# Altium PCB Fusebox_PCB.PcbDoc
Units mm, origin at the board's own origin, x right, y up, seen from the top; angles counter-clockwise.
Board outline 110 x 90 mm, 4 copper layers (Top Layer, Inner Layer1, Inner Layer2, Bottom Layer), stack 1.369 mm thick; 100 components, 77 nets, 364 pads, 0 vias.
Unrouted connection lines stored in the file: 258.
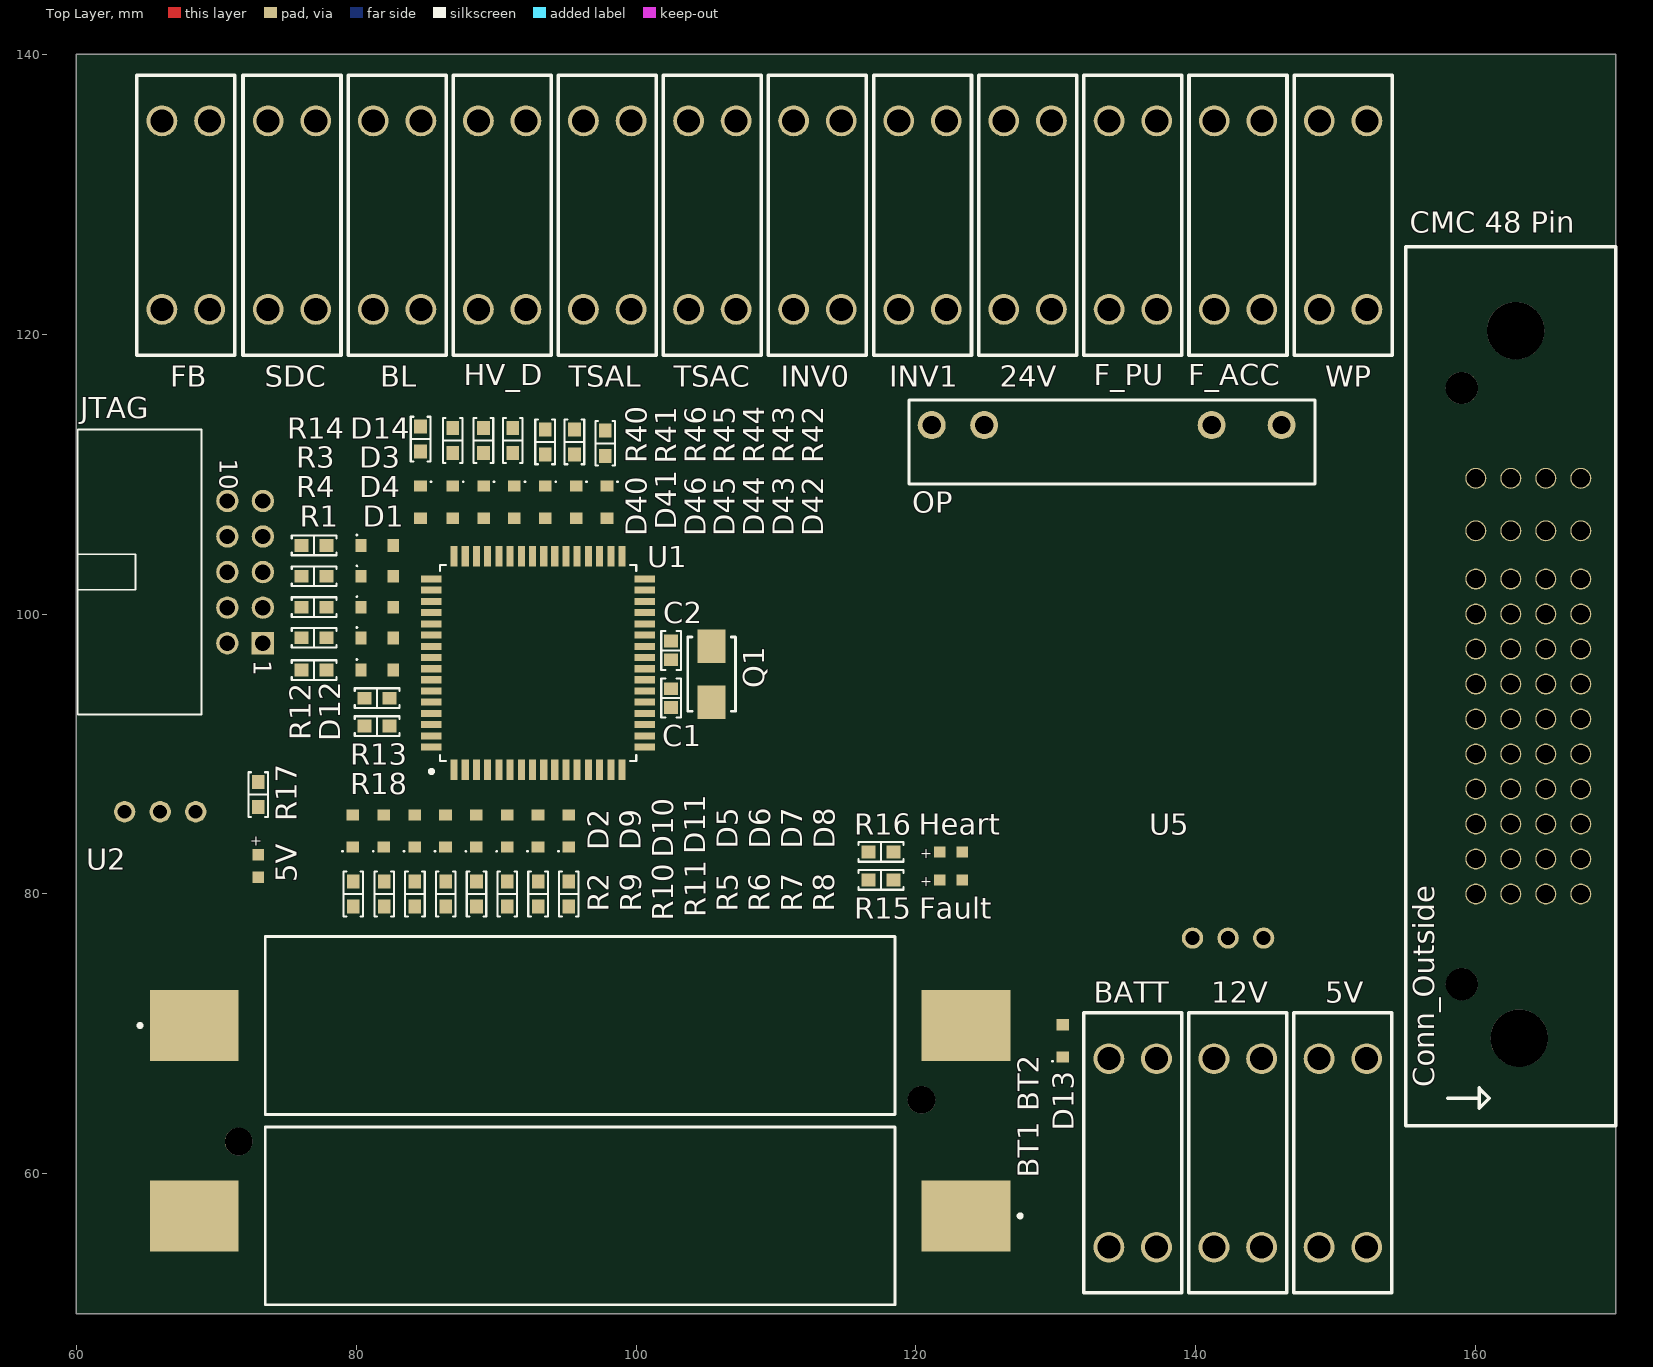
[diagram p0: Top Layer view]
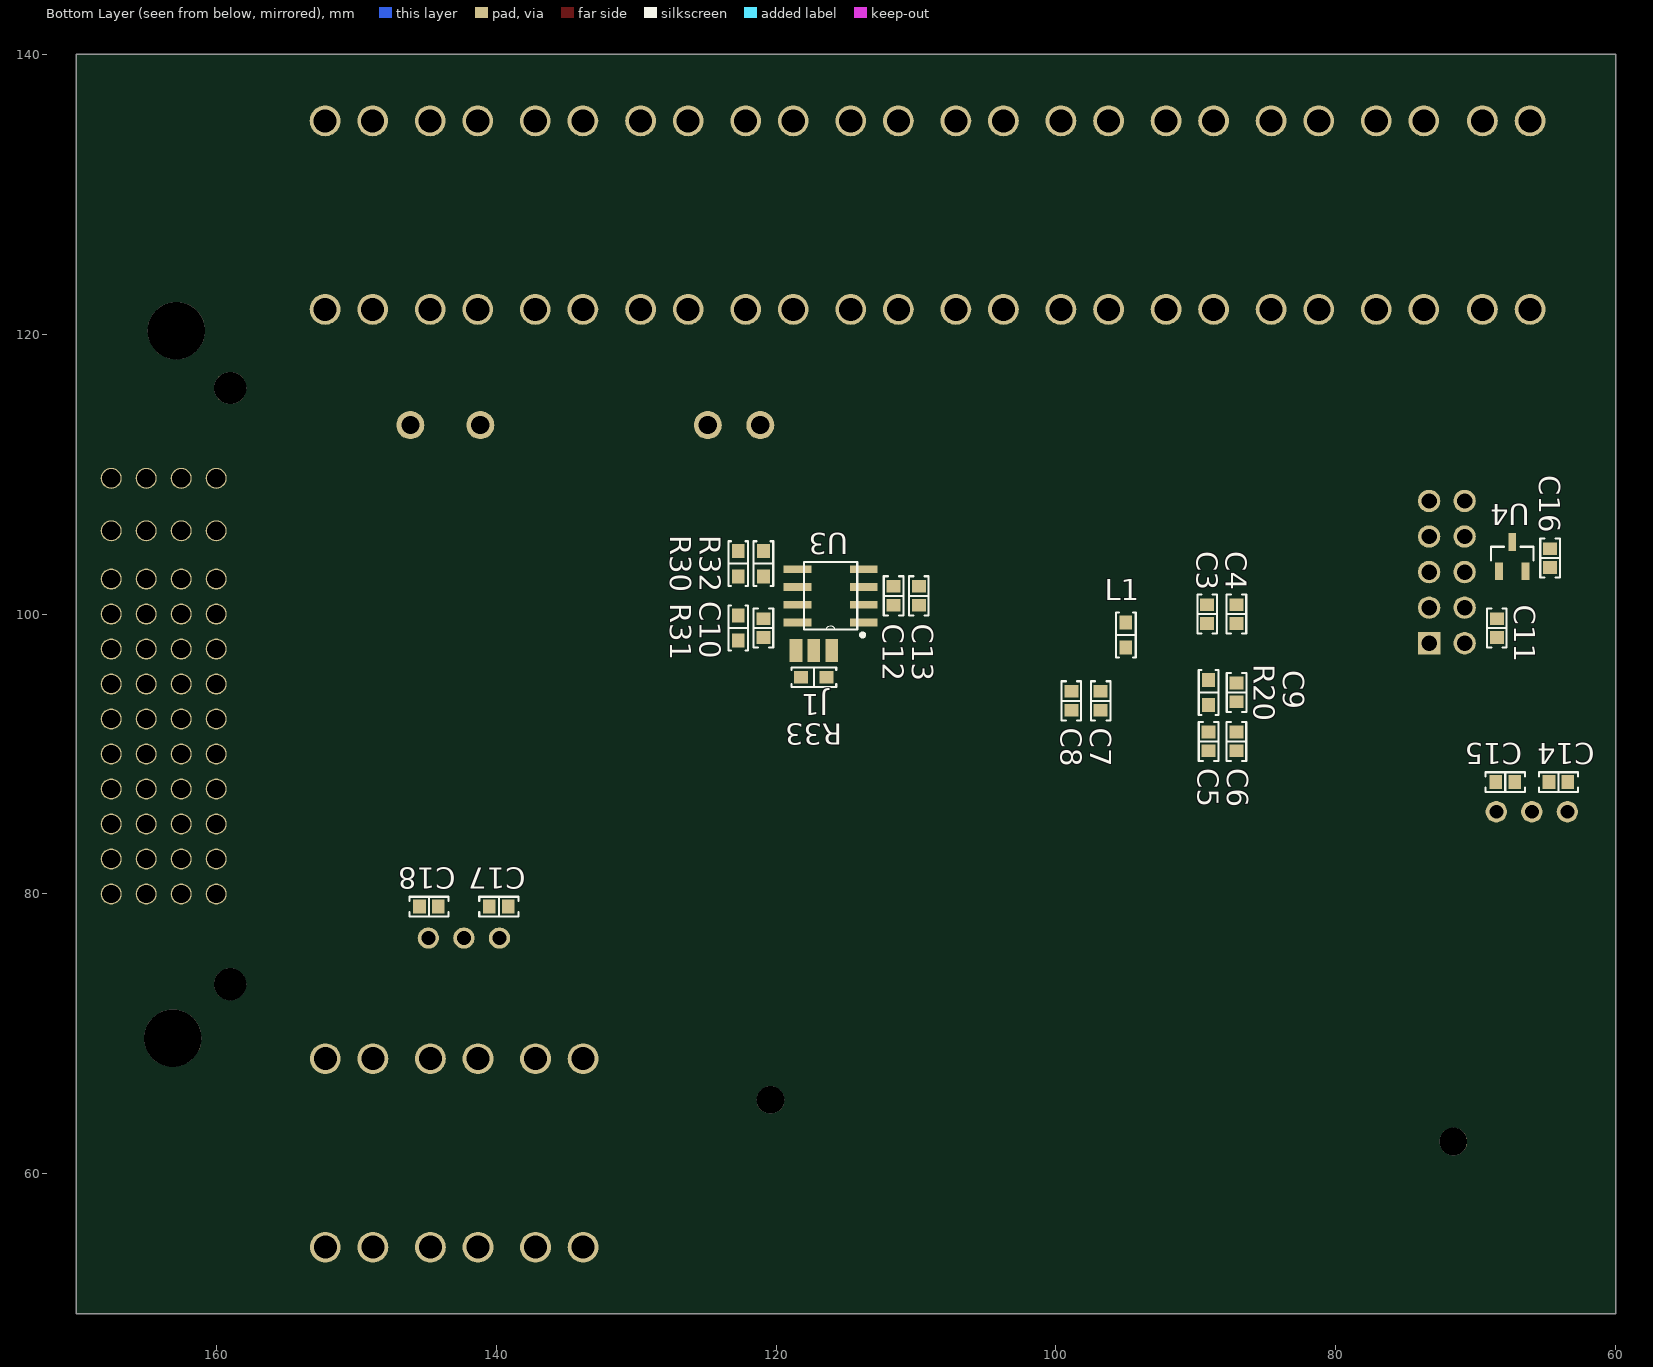
[diagram p1: Bottom Layer view, seen from below]

## Layer stack, top to bottom
Top Solder: solder mask 0.0254, SM-001, Dk 4
Top Layer: signal copper 0.035
Dielectric 1: prepreg 0.1295, PP-017, Dk 4.3
Dielectric 2: prepreg 0.1295, PP-017, Dk 4.3
Inner Layer1: signal copper 0.035
Dielectric 3: core 0.7112, Core-039, Dk 4.8
Inner Layer2: signal copper 0.035
Dielectric 4: prepreg 0.1295, PP-017, Dk 4.3
Dielectric 5: prepreg 0.1295, PP-017, Dk 4.3
Bottom Layer: signal copper 0.035
Bottom Solder: solder mask 0.0254, SM-001, Dk 4

## Board outline
60,50 170,50 170,140 60,140

## Design rules (kind name [scope] priority, off if disabled: settings)
BoardOutlineClearance [All] p1: gap=0.2 ignorepadtopadclearanceinfootprint=FALSE // Trace to V-cut >0.4mm
Clearance [All] p1: gap=0.254 ignorepadtopadclearanceinfootprint=TRUE except(0: Arc-Hole Track-Hole SMDPad-Hole THPad-Hole Via-Hole Fill-Hole Poly-Hole Region-Hole Text-Hole; 0.127: Arc-Arc Arc-Track Arc-Fill Arc-Poly Arc-Region Track-Track Track-Fill Track-Poly Track-Region SMDPad-SMDPad; 0.15: Arc-Text Track-Text SMDPad-Text THPad-Text Via-Text Fill-Text Poly-Text Region-Text Text-Text; 0.2: Arc-SMDPad Track-SMDPad SMDPad-Fill SMDPad-Poly SMDPad-Region; 0.33: Arc-THPad Track-THPad THPad-Fill THPad-Poly THPad-Region; 0.5: SMDPad-THPad THPad-THPad THPad-Via)
ComponentClearance [All] p1: gap=0.254 collisioncheckmode=3 verticalgap=0 showdistances=FALSE
DiffPairsRouting [All] p1: maxlimit=10 minlimit=0.254 mostfreqgap=0.254 toplayer_minwidth=0.127 toplayer_maxwidth=5 toplayer_prefwidth=0.254 midlayer1_minwidth=0.127 midlayer1_maxwidth=5 midlayer1_prefwidth=0.254 midlayer2_minwidth=0.127 midlayer2_maxwidth=5 midlayer2_prefwidth=0.254 bottomlayer_minwidth=0.127 bottomlayer_maxwidth=5 bottomlayer_prefwidth=0.254 maxuncoupledlength=12.7
Height [All] p1: minheight=0 maxheight=100 prefheight=12.7
HoleSize [All] p1: absolutevalues=TRUE maxlimit=6.3 minlimit=0.2 maxpercent=80.000 minpercent=20.000 // Finished hole size tolerance +0.13/-0.08mm
HoleToHoleClearance [All] p1: gap=0.5 allowstackedmicrovias=TRUE
MinimumAnnularRing [All] p1: minimumring=0.13 // 1oz Copper
PolygonConnect [All] p1: connectstyle=Relief reliefconductorwidth=0.254 reliefentries=4 polygonreliefangle="90 Angle" airgapwidth=0.254
RoutingVias [All] p1: holewidth=0.711 width=1.27 viastyle="Through Hole" minholewidth=0.3 minwidth=0.6 maxholewidth=0.711 maxwidth=1.27
SolderMaskExpansion [All] p1: expansion=0.05 istentingtop=FALSE
Width [All] p1: maxlimit=20 minlimit=0.09 preferedwidth=0.25 minimp=50.000000 maximp=50.000000 favimp=50.000000
25 further rules are at their usual default settings.

## Classes and differential pairs
component class Supply_Fusing: 5V 12V 24V BATT BL BT1 BT2 D1 D2 D3 D4 D5 D6 D7 D8 D9 D10 D11 D13 D14 F_ACC F_PU FB HV_D INV0 INV1 R1 R2 R3 R4 R5 R6 R7 R8 R9 R10 R11 R14 SDC TSAC TSAL WP
component class Shutdown_Converter: D40 D41 D42 D43 D44 D45 D46 R40 R41 R42 R43 R44 R45 R46
component class Controller: 5V C1 C2 C3 C4 C5 C6 C7 C8 C9 C10 C11 C12 C13 C14 C15 C16 C17 C18 D12 Fault Heart J1 JTAG L1 OP Q1 R12 R13 R15 R16 R17 R18 R20 R30 R31 R32 R33 U1 U2 U3 U4 U5
component class Connector: "CMC 48 Pin"
differential pair XCAN: +XCAN_P -XCAN_N
differential pair GPS: +GPS_P -GPS_N
differential pair CAN: +CAN_P -CAN_N

## Components (designator, comment, footprint, x,y, rotation, side; value= is the part's Value field where it differs from the comment)
5V "Keystone 3557-2" "Keystone 3557-2" 150.5,61.5 r270 top (schematic designator F15)
5V "Green, 3.2V" WL-SMCW_0603_H=0.7mm 73,82 r90 top
12V "Keystone 3557-2" "Keystone 3557-2" 142.992,61.5 r270 top (schematic designator F14)
24V "Keystone 3557-2" "Keystone 3557-2" 127.975,128.5 r270 top (schematic designator F1)
BATT "Keystone 3557-2" "Keystone 3557-2" 135.483,61.5 r270 top (schematic designator F13)
BL "Keystone 3557-2" "Keystone 3557-2" 82.926,128.5 r270 top (schematic designator F3)
BT1 "Batt_Keystone_1020_eec" Keystone_1020_0 96,57 r180 top
BT2 "Batt_Keystone_1020_eec" Keystone_1020_0 96,70.604 r0 top
C1 "SMD Capacitor" "CAP 0603/1608" 102.5,94 r90 top value=18p
C2 "SMD Capacitor" "CAP 0603/1608" 102.5,97.4 r270 top value=18p
C3 "SMD Capacitor" "CAP 0603/1608" 89.2,100 r90 bottom value=1u
C4 "SMD Capacitor" "CAP 0603/1608" 87.1,100 r90 bottom value=100n
C5 "SMD Capacitor" "CAP 0603/1608" 89.1,90.9 r270 bottom value=1u
C6 "SMD Capacitor" "CAP 0603/1608" 87.1,90.9 r270 bottom value=100n
C7 "SMD Capacitor" "CAP 0603/1608" 96.8,93.8 r90 bottom value=1u
C8 "SMD Capacitor" "CAP 0603/1608" 98.9,93.8 r90 bottom value=100n
C9 "SMD Capacitor" "CAP 0603/1608" 87.096,94.4 r90 bottom value=1u
C10 "SMD Capacitor" "CAP 0603/1608" 120.896,99 r270 bottom value=4u7
C11 "SMD Capacitor" "CAP 0603/1608" 68.5,99 r90 bottom value=100n
C12 "SMD Capacitor" "CAP 0603/1608" 111.6,101.3 r90 bottom value=100n
C13 "SMD Capacitor" "CAP 0603/1608" 109.796,101.3 r90 bottom value=100n
C14 "24V" "CAP 0603/1608" 64.1,88 r180 bottom value=2u2
C15 "5V" "CAP 0603/1608" 67.9,88 r0 bottom value=1u
C16 "SMD Capacitor" "CAP 0603/1608" 64.7,104 r90 bottom value=1u
C17 "SMD Capacitor" "CAP 0603/1608" 139.8,79.1 r180 bottom value=2u2
C18 "SMD Capacitor" "CAP 0603/1608" 144.8,79.1 r0 bottom value=1u
"CMC 48 Pin" "Molex48PIN" "Molex 48 Pin Header CMC/CMX" 160,109.7 r90 top
D1 "MM3Z4V7T1G" SOD-323-2 81.5,98.287 r0 top
D2 "MM3Z4V7T1G" SOD-323-2 79.77,84.5 r90 top
D3 "MM3Z4V7T1G" SOD-323-2 81.5,102.696 r0 top
D4 "MM3Z4V7T1G" SOD-323-2 81.5,100.491 r0 top
D5 "MM3Z4V7T1G" SOD-323-2 88.587,84.5 r90 top
D6 "MM3Z4V7T1G" SOD-323-2 90.791,84.5 r90 top
D7 "MM3Z4V7T1G" SOD-323-2 92.996,84.5 r90 top
D8 "MM3Z4V7T1G" SOD-323-2 95.2,84.5 r90 top
D9 "MM3Z4V7T1G" SOD-323-2 81.974,84.5 r90 top
D10 "MM3Z4V7T1G" SOD-323-2 84.179,84.5 r90 top
D11 "MM3Z4V7T1G" SOD-323-2 86.383,84.5 r90 top
D12 "MM3Z4V7T1G" SOD-323-2 81.5,96 r0 top
D13 "CUS521,H3F" SOD-323-2 130.5,69.5 r90 top
D14 "MM3Z4V7T1G" SOD-323-2 81.5,104.9 r0 top
D40 "MM3Z4V7T1G" SOD-323-2 84.6,108 r270 top
D41 "MM3Z4V7T1G" SOD-323-2 86.9,108 r270 top
D42 "MM3Z4V7T1G" SOD-323-2 97.921,108 r270 top
D43 "MM3Z4V7T1G" SOD-323-2 95.717,108 r270 top
D44 "MM3Z4V7T1G" SOD-323-2 93.513,108 r270 top
D45 "MM3Z4V7T1G" SOD-323-2 91.309,108 r270 top
D46 "MM3Z4V7T1G" SOD-323-2 89.104,108 r270 top
F_ACC "Keystone 3557-2" "Keystone 3557-2" 143.008,128.5 r270 top (schematic designator F5)
F_PU "Keystone 3557-2" "Keystone 3557-2" 135.5,128.5 r270 top (schematic designator F6)
Fault "Red, 2V" WL-SMCW_0603_H=0.7mm 122.5,81 r180 top
FB "Keystone 3557-2" "Keystone 3557-2" 67.827,128.5 r270 top (schematic designator F12)
Heart "Blue, 3.2V" WL-SMCW_0603_H=0.7mm 122.5,83 r180 top
HV_D "Keystone 3557-2" "Keystone 3557-2" 90.434,128.5 r270 top (schematic designator F2)
INV0 "Keystone 3557-2" "Keystone 3557-2" 112.959,128.5 r270 top (schematic designator F10)
INV1 "Keystone 3557-2" "Keystone 3557-2" 120.467,128.5 r270 top (schematic designator F11)
J1 "JUMPERID" SMD-JUMPER-3 117.3,97.4 r180 bottom net-tie
JTAG "61201021721" 61201021721 72.07,103 r270 top
L1 "SMD Inductor" "STACKPOLE CSR0603" 95,98.5 r270 bottom value=100n
OP "Finder 34.81.7.005.9024" "Finder 34.81 Series" 133,113.5 r0 top
Q1 "16M" "NDK NX5032GA" 105.4,95.7 r270 top
R1 "SMD Resistor" "STACKPOLE CSR0603" 77,98.3 r180 top value=10k
R2 "SMD Resistor" "STACKPOLE CSR0603" 79.8,80 r270 top value=10k
R3 "SMD Resistor" "STACKPOLE CSR0603" 77,102.7 r180 top value=10k
R4 "SMD Resistor" "STACKPOLE CSR0603" 77,100.5 r180 top value=10k
R5 "SMD Resistor" "STACKPOLE CSR0603" 88.6,80 r270 top value=10k
R6 "SMD Resistor" "STACKPOLE CSR0603" 90.8,80 r270 top value=10k
R7 "SMD Resistor" "STACKPOLE CSR0603" 93,80 r270 top value=10k
R8 "SMD Resistor" "STACKPOLE CSR0603" 95.2,80 r270 top value=10k
R9 "SMD Resistor" "STACKPOLE CSR0603" 82,80 r270 top value=10k
R10 "SMD Resistor" "STACKPOLE CSR0603" 84.2,80 r270 top value=10k
R11 "SMD Resistor" "STACKPOLE CSR0603" 86.4,80 r270 top value=10k
R12 "SMD Resistor" "STACKPOLE CSR0603" 77,96 r180 top value=10k
R13 "SMD Resistor" "STACKPOLE CSR0603" 81.5,93.996 r180 top value=2k5
R14 "SMD Resistor" "STACKPOLE CSR0603" 77,104.9 r180 top value=10k
R15 "SMD Resistor" "STACKPOLE CSR0603" 117.5,81 r0 top value=1k
R16 "SMD Resistor" "STACKPOLE CSR0603" 117.5,83 r0 top value=1k
R17 "P = 0.003 W" "STACKPOLE CSR0603" 73,87.1 r90 top value=1k
R18 "SMD Resistor" "STACKPOLE CSR0603" 81.5,92 r180 top value=10k
R20 "SMD Resistor" "STACKPOLE CSR0603" 89.1,94.4 r90 bottom value=100
R30 "SMD Resistor" "STACKPOLE CSR0603" 122.7,103.6 r270 bottom value=60
R31 "SMD Resistor" "STACKPOLE CSR0603" 122.7,99 r270 bottom value=60
R32 "SMD Resistor" "STACKPOLE CSR0603" 120.896,103.6 r270 bottom value=300
R33 "SMD Resistor" "STACKPOLE CSR0603" 117.3,95.496 r180 bottom
R40 "SMD Resistor" "STACKPOLE CSR0603" 84.6,112.5 r90 top value=10k
R41 "SMD Resistor" "STACKPOLE CSR0603" 86.9,112.4 r90 top value=10k
R42 "SMD Resistor" "STACKPOLE CSR0603" 97.8,112.2 r90 top value=10k
R43 "SMD Resistor" "STACKPOLE CSR0603" 95.6,112.3 r90 top value=10k
R44 "SMD Resistor" "STACKPOLE CSR0603" 93.5,112.3 r90 top value=10k
R45 "SMD Resistor" "STACKPOLE CSR0603" 91.2,112.4 r90 top value=10k
R46 "SMD Resistor" "STACKPOLE CSR0603" 89.1,112.4 r90 top value=10k
SDC "Keystone 3557-2" "Keystone 3557-2" 75.417,128.5 r270 top (schematic designator F4)
TSAC "Keystone 3557-2" "Keystone 3557-2" 105.45,128.5 r270 top (schematic designator F9)
TSAL "Keystone 3557-2" "Keystone 3557-2" 97.942,128.5 r270 top (schematic designator F8)
U1 "AT90CAN128" *QFP80P1600X1600X120-64N 93,96.5 r90 top
U2 "R-78E05-1.0" SIP3_RECOM 66,88.125 r0 top
U3 "MCP2551-I/SN" *SOIC127P600X175-8N 116.1,101.3 r0 bottom
U4 "MCP130T-450I/TT" *SOT95P237X112-3N 67.4,104.1 r180 bottom
U5 "R-78E12-1.0/X9" SIP3_RECOM 142.3,79.1 r0 top
WP "Keystone 3557-2" "Keystone 3557-2" 150.517,128.5 r270 top (schematic designator F7)

## Footprints (in the part's own frame and the unit in brackets; to place one, negate y for a bottom-side part, rotate by r counter-clockwise, add the part's x,y. Pads: shape width x height; smd on the part's side, far side on the other; paste and mask are expansions set on the pad)
61201021721 [mm] "10 pins, right angled, gold plating"
  rect 1.6x1.6 hole 1.1: 1(5.08,1.27)
  round 1.6 hole 1.1: 2(5.08,-1.27) 3(2.54,1.27) 4(2.54,-1.27) 5(0,1.27) 6(0,-1.27) 7(-2.54,1.27) 8(-2.54,-1.27) 9(-5.08,1.27) 10(-5.08,-1.27)
  silkscreen extent -10.18,-11.96 10.18,-3.11, body extent -10.18,-11.96 10.18,1.59, height 9.13
*QFP80P1600X1600X120-64N [mil]
  rect 58x20 smd: 1(-300,236) 2(-300,205) 3(-300,173) 4(-300,142) 5(-300,110) 6(-300,79) 7(-300,47) 8(-300,16) 9(-300,-16) 10(-300,-47) 11(-300,-79) 12(-300,-110) 13(-300,-142) 14(-300,-173) 15(-300,-205) 16(-300,-236) 33(300,-236) 34(300,-205) 35(300,-173) 36(300,-142) 37(300,-110) 38(300,-79) 39(300,-47) 40(300,-16) 41(300,16) 42(300,47) 43(300,79) 44(300,110) 45(300,142) 46(300,173) 47(300,205) 48(300,236)
  rect 20x58 smd: 17(-236,-300) 18(-205,-300) 19(-173,-300) 20(-142,-300) 21(-110,-300) 22(-79,-300) 23(-47,-300) 24(-16,-300) 25(16,-300) 26(47,-300) 27(79,-300) 28(110,-300) 29(142,-300) 30(173,-300) 31(205,-300) 32(236,-300) 49(236,300) 50(205,300) 51(173,300) 52(142,300) 53(110,300) 54(79,300) 55(47,300) 56(16,300) 57(-16,300) 58(-47,300) 59(-79,300) 60(-110,300) 61(-142,300) 62(-173,300) 63(-205,300) 64(-236,300)
  silkscreen extent -310,-276 276,305, body extent -270,-270 270,270, height 30
*SOIC127P600X175-8N [mil]
  rect 78x22 smd: 1(-93,75) 2(-93,25) 3(-93,-25) 4(-93,-75) 5(93,-75) 6(93,-25) 7(93,25) 8(93,75)
  silkscreen extent -95,-95 75,115, body extent -75,-95 75,95, height 80
*SOT95P237X112-3N [mil]
  rect 22x50 smd: 1(-37,-41) 2(37,-41) 3(0,41)
  silkscreen extent -60,-10 60,28, body extent -60,-25 60,25, height 50
"CAP 0603/1608" [mm] "Chip Capacitor, 2-Leads, Body 1.60x0.80mm, IPC Medium Density"
  rect 0.9x1 smd: 1(-0.675,0) 2(0.675,0)
  silkscreen extent -1.4,-0.7 1.4,0.7, body extent -0.8,-0.41 0.8,0.41, height 0.82
"Finder 34.81 Series" [mm] "Opto-Isolator"
  round 2 hole 1.3: 1(-8.125,0) 2(-11.875,0) 3(8.125,0) 4(13.125,0)
  silkscreen extent -13.5,-4.2 15.5,1.8, body extent -13,-3.7 15,1.3, height 15.17
"Keystone 3557-2" [mm] "Fuse Holder"
  round 2.2 hole 1.65: I1(-6.735,1.7) I2(-6.735,-1.7) O1(6.735,1.7) O2(6.735,-1.7)
  silkscreen extent -10,-3.5 10,3.5
Keystone_1020_0 [mm]
  rect 6.35x5.08 smd paste+0 mask+0: 1(-27.57,0) 2(27.57,0)
  round 1.98 hole 1.98 unplated paste-1000 mask+0: ""(24.395,-5.31)
  silkscreen extent -31.57,-6.35 22.5,6.35
"Molex 48 Pin Header CMC/CMX" [mm]
  round 1.5 hole 1.3: 1(-29.7,0) 2(-27.2,0) 3(-24.7,0) 4(-22.2,0) 5(-19.7,0) 6(-17.2,0) 7(-14.7,0) 8(-12.2,0) 9(-9.7,0) 10(-7.2,0) 11(-3.75,0) 12(0,0) 13(-29.7,-2.5) 14(-27.2,-2.5) 15(-24.7,-2.5) 16(-22.2,-2.5) 17(-19.7,-2.5) 18(-17.2,-2.5) 19(-14.7,-2.5) 20(-12.2,-2.5) 21(-9.7,-2.5) 22(-7.2,-2.5) 23(-3.75,-2.5) 24(0,-2.5) 25(-29.7,-5) 26(-27.2,-5) 27(-24.7,-5) 28(-22.2,-5) 29(-19.7,-5) 30(-17.2,-5) 31(-14.7,-5) 32(-12.2,-5) 33(-9.7,-5) 34(-7.2,-5) 35(-3.75,-5) 36(0,-5) 37(-29.7,-7.5) 38(-27.2,-7.5) 39(-24.7,-7.5) 40(-22.2,-7.5) 41(-19.7,-7.5) 42(-17.2,-7.5) 43(-14.7,-7.5) 44(-12.2,-7.5) 45(-9.7,-7.5) 46(-7.2,-7.5) 47(-3.75,-7.5) 48(0,-7.5)
  round 4.1 hole 4.1: 50(-40,-3.1) 50(10.55,-2.85)
  round 2.3 hole 2.3: 50(-36.15,1) 50(6.45,1)
  silkscreen extent -46.25,-10 16.55,5, body extent -55.14,-47.05 25.44,2.05, height 33.65
"NDK NX5032GA" [mm] "Crystal, 2-Leads, Body 5.00x3.20mm, IPC Medium Density"
  rect 2.4x2 smd: 1(-2,0) 2(2,0)
  silkscreen extent -2.65,-1.7 2.65,1.7, body extent -2.5,-1.6 2.5,1.6, height 1.2
SIP3_RECOM [mm]
  round 1.524 hole 1: 1(-2.54,-2.25) 2(0,-2.25) 3(2.54,-2.25)
  body extent -5.75,-4.25 5.75,4.25, height 10.4
SMD-JUMPER-3 [mm] "Jumper, SMD"
  rect 0.9x1.65 smd: 1(-1.27,0) 2(0,0) 3(1.27,0)
SOD-323-2 [mm] "SODFL, 2-Leads, Body 1,30x2,50mm, IPC Low Density"
  rect 0.8x0.9 smd: 1C(-1.15,0) 2A(1.15,0)
  silkscreen extent -1.5,0.7 -1.4,0.8, body extent -1.25,-0.72 1.25,0.72, height 1.15
"STACKPOLE CSR0603" [mm] "Chip Resistor, 2-Leads, Body 1.60x0.80mm, IPC Medium Density"
  rect 1x0.9 smd: 1(-0.9,0) 2(0.9,0)
  silkscreen extent -1.6,-0.7 1.6,0.7, body extent -0.85,-0.4 0.85,0.4, height 0.45
WL-SMCW_0603_H=0.7mm [mm] "SMD Mono-color Chip LED, body 1.6x0.8mm"
  rect 0.8x0.8 smd: 1(-0.8,0) 2(0.8,0)
  body extent -0.8,-0.4 0.8,0.4, height 0.7

## Part data
5V 12V 24V BATT BL F_ACC F_PU FB HV_D INV0 INV1 SDC TSAC TSAL WP: "Keystone 3557-2 / Fuse Holder", ComponentLink1Description=Octopart, ComponentLink1URL=https://octopart.com/3557-2-keystone-850400?r=sp
5V: library part 150060GS75000, "WL-SMCW SMT Mono-color Chip LED Waterclear, size 0603, Green, 3.2V, 140deg", Emitting Color=Green, Forward Voltage typ.=3.2V, Operating Temperature="-40 to +85degC", Chip Technology=InGaN, ComponentLink1Description=Manufacturer, ComponentLink1URL=http://www.we-online.de, ComponentLink2Description=Datasheet, ComponentLink2URL=https://www.we-online.com/catalog/datasheet/150060GS75000.pdf, Dominant Wavelength typ.=525nm, Luminous Intensity typ.=430mcd, Mounting Technology=SMT, Packaging="Tape and Reel", Part Number=150060GS75000, Peak Wavelength typ.=515nm, Published Date="December 2019", Publisher="Wurth Elektronik", Size=0603, Viewing Angle=140deg
BT1 BT2: "BATT HOLDER BATTERY AAA SMD", Digikey Part Number=36-1020-ND, Manufacturer=Keystone, Mouser Part Number=534-1020, Package=BT_HLDR_SMT, Part Number=1020, Temperature="-50°C to +145°C", Temperature Range High=+145°C, Temperature Range Low=-50°C, Voltage=SKIP, ComponentLink1Description=Upverter, ComponentLink1URL=https://upverter.com/upn/revision/aeadfed39ba6ac98/, ComponentLink2Description=Datasheet, ComponentLink2URL=http://www.keyelco.com/product-pdf.cfm?p=934, Digikey Description="BATT HOLDER BATTERY AAA SMD", helpURL=https://upverter.com/upn/revision/aeadfed39ba6ac98/, Lead Free=yes, Price=1.62889830371, RoHS=TRUE, Supplier 1=Digi-Key, Supplier 2=Mouser, Supplier Part Number 1=36-1020-ND, Supplier Part Number 2=534-1020
C1 C2 C3 C4 C5 C6 C7 C8 C9 C10 C11 C12 C13 C16 C17 C18: "Capacitor with multiple Footprints"
C14 C15: library part "SMD Capacitor", "Capacitor with multiple Footprints"
D1 D2 D3 D4 D5 D6 D7 D8 D9 D10 D11 D12 D14 D40 D41 D42 D43 D44 D45 D46: "onsemi MM3Z4V7T1G / Z-Diode, 4,7V", ComponentLink1Description=Octopart, ComponentLink1URL=https://octopart.com/mm3z4v7t1g-onsemi-331144?r=sp
D13: "Toshiba CUS521,H3F / Shottky-Diode / Forward: 390mV, Reverse: 30V", ComponentLink1Description=Octopart, ComponentLink1URL=https://octopart.com/cus521%2Ch3f-toshiba-26712463?r=sp
Fault: library part 150060RS75000, "WL-SMCW SMT Mono-color Chip LED Waterclear, size 0603, Red, 2V, 140deg", Emitting Color=Red, Forward Voltage typ.=2V, Operating Temperature="-40 to +85degC", Chip Technology=AlInGaP, ComponentLink1Description=Manufacturer, ComponentLink1URL=http://www.we-online.de, ComponentLink2Description=Datasheet, ComponentLink2URL=https://www.we-online.com/catalog/datasheet/150060RS75000.pdf, Dominant Wavelength typ.=625nm, Luminous Intensity typ.=250mcd, Mounting Technology=SMT, Packaging="Tape and Reel", Part Number=150060RS75000, Peak Wavelength typ.=630nm, Published Date="December 2019", Publisher="Wurth Elektronik", Size=0603, Viewing Angle=140deg
Heart: library part 150060BS75000, "WL-SMCW SMT Mono-color Chip LED Waterclear, size 0603, Blue, 3.2V, 140deg", Emitting Color=Blue, Forward Voltage typ.=3.2V, Operating Temperature="-40 to +85degC", Chip Technology=InGaN, ComponentLink1Description=Manufacturer, ComponentLink1URL=http://www.we-online.de, ComponentLink2Description=Datasheet, ComponentLink2URL=https://www.we-online.com/catalog/datasheet/150060BS75000.pdf, Dominant Wavelength typ.=470nm, Luminous Intensity typ.=145mcd, Mounting Technology=SMT, Packaging="Tape and Reel", Part Number=150060BS75000, Peak Wavelength typ.=465nm, Published Date="December 2019", Publisher="Wurth Elektronik", Size=0603, Viewing Angle=140deg
J1: library part "SMD Jumper 3"
JTAG: "WR-BHD 2.54mm Male Angled Box Header", Manufacturer="Wurth Elektronik", ComponentLink1 Description=Manufacturer, ComponentLink1URL=http://www.we-online.com, ComponentLink2 Description=Datasheet, ComponentLink2URL=http://katalog.we-online.de/em/datasheet/6120xx21721.pdf, Created by="Baojun Chen", Created Date="March 2016", NoPins=10, partNo=61201021721
OP: library part "Finder 34.81 Series", "Opto-Isolator / Finder 34.81 series", ComponentLink1Description=Finder, ComponentLink1URL=https://www.findernet.com/de/deutschland/series/serie-34-schmales-steck-printrelais-emr-oder-ssr-01-2-6a/
Q1: library part "16 MHz Quartz", "16 MHz Quartz"
R1 R2 R3 R4 R5 R6 R7 R8 R9 R10 R11 R12 R13 R14 R15 R16 R18 R20 R30 R31 R32 R33 R40 R41 R42 R43 R44 R45 R46: "Resistor with multiple footprints"
R17: library part "SMD Resistor", "Resistor with multiple footprints"
U1: "Ic Mcu 8bit 128kb Flash 64tqfp", Package="TQFP-64 Microchip", Availability=Unavailable, MF=Microchip, MP=AT90CAN128-16AI, Price=None, SnapEDA_Link=https://www.snapeda.com/parts/AT90CAN128-16AI/Microchip/view-part/?ref=snap
U2: "Nonisolated 5V Switchmode converter"
U3: "MCP2551 Series 5.5 V 1 Mb/s Surface Mount High-Speed CAN Transceiver - SOIC-8", Package="SOIC-8 Microchip", Availability=Unavailable, MF=Microchip, MP=MCP2551-I/SN, Price=None, SnapEDA_Link=https://www.snapeda.com/parts/MCP2551-I/SN/Microchip/view-part/?ref=snap
U4: "System Supervisors - Power Supply Monitors with Reset Generators Open Drain Low", Package="SOT-23-3 Microchip", Availability=Unavailable, MF=Microchip, MP=MCP120T-450I/TT, Price=None, SnapEDA_Link=https://www.snapeda.com/parts/MCP120T-450I/TT/Microchip/view-part/?ref=snap
U5: library part R-78E05-1.0, "Nonisolated 5V Switchmode converter"

## Nets (pads, with @x,y where several pads share a name; then routed paths per layer and width w, separated by ;. In a path a pad name is that pad's centre, name@x,y a point inside that pad or via, vN(x,y) a via of type N, cw(c..) or ccw(c..) an arc to the next point about the centre after c; other vN are vias at no path point)
5V: 5V.I1 5V.I2 C3.2 C4.2 C5.2 C6.2 C7.1 C8.1 C11.2 C12.2 C13.2 C15.2 C16.1 JTAG.4 JTAG.7 L1.1 L1.2 R17.2 R20.2 U1.21 U1.52 U1.64 U2.3 U3.3 U4.2
12V: 12V.I1 12V.I2 C18.2 U5.3
24V_Fused: 24V.O1 24V.O2 "CMC 48 Pin.5" "CMC 48 Pin.17" "CMC 48 Pin.29" "CMC 48 Pin.41" R1.2
Aim_EVO_Fused: 12V.O1 12V.O2 "CMC 48 Pin.3" R14.2
Board_Voltage: D12.1C R12.1 R13.2 U1.60
Brakelight_Fused: "CMC 48 Pin.13" BL.O1 BL.O2 R3.2
CAN_N: "CMC 48 Pin.8" "CMC 48 Pin.20" "CMC 48 Pin.32" "CMC 48 Pin.44" R30.1 U3.6
CAN_P: "CMC 48 Pin.7" "CMC 48 Pin.19" "CMC 48 Pin.31" "CMC 48 Pin.43" R31.2 U3.7
FAN_ACC_Sup_Fused: F_ACC.O1 F_ACC.O2 OP.3 R5.2
FAN_ACC_Sup_Out: "CMC 48 Pin.23" OP.4
FAN_ACC_Switch: OP.1 U1.12
FAN_PU_CTRL: "CMC 48 Pin.26" U1.10
FAN_PU_Sup_Fused: "CMC 48 Pin.11" "CMC 48 Pin.12" F_PU.O1 F_PU.O2 R6.2
FRO_24V: D1.1C R1.1 U1.51
FRO_Aim_EVO: D14.1C R14.1 U1.48
FRO_Brakelight: D3.1C R3.1 U1.49
FRO_FAN_ACC_Sup: D5.1C R5.1 U1.6
FRO_FAN_PU_Sup: D6.1C R6.1 U1.7
FRO_HV_Distri: D2.1C R2.1 U1.2
FRO_INV0: D10.1C R10.1 U1.4
FRO_INV1: D11.1C R11.1 U1.5
FRO_Shutdown: D4.1C R4.1 U1.50
FRO_TSAC: D9.1C R9.1 U1.3
FRO_TSAL: D8.1C R8.1 U1.9
FRO_WP_Sup: D7.1C R7.1 U1.8
Fusebox_Fused: C14.2 C17.2 FB.O1 FB.O2 U2.1 U5.1
GND: 5V.1 "CMC 48 Pin.6" "CMC 48 Pin.16" "CMC 48 Pin.18" "CMC 48 Pin.30" "CMC 48 Pin.42" "CMC 48 Pin.48" BT1.1 C1.1 C2.1 C3.1 C4.1 C5.1 C6.1 C7.2 C8.2 C9.2 C10.2 C11.1 C12.1 C13.1 C14.1 C15.1 C16.2 C17.1 C18.1 D1.2A D2.2A D3.2A D4.2A D5.2A D6.2A D7.2A D8.2A D9.2A D10.2A D11.2A D12.2A D14.2A D40.2A D41.2A D42.2A D43.2A D44.2A D45.2A D46.2A Fault.1 Heart.1 J1.1 JTAG.2 JTAG.10 OP.2 R13.1 R33.1 U1.22 U1.53 U1.63 U2.2 U3.2 U4.3 U5.2
GPS_5V: 5V.O1 5V.O2 "CMC 48 Pin.4"
GPS_N: "CMC 48 Pin.40" U1.28
GPS_P: "CMC 48 Pin.28" U1.27
HV_Distri_Fused: "CMC 48 Pin.2" HV_D.O1 HV_D.O2 R2.2
INV0_Fused: "CMC 48 Pin.27" INV0.O1 INV0.O2 R10.2
INV1_Fused: "CMC 48 Pin.39" INV1.O1 INV1.O2 R11.2
JTAG_TCK: JTAG.1 U1.57
JTAG_TDI: JTAG.9 U1.54
JTAG_TDO: JTAG.3 U1.55
JTAG_TMS: JTAG.5 U1.56
LVMS_G_Out: 24V.I1 24V.I2 "CMC 48 Pin.35" "CMC 48 Pin.36" "CMC 48 Pin.47" BL.I1 BL.I2 F_ACC.I1 F_ACC.I2 F_PU.I1 F_PU.I2 FB.I1 FB.I2 HV_D.I1 HV_D.I2 INV0.I1 INV0.I2 INV1.I1 INV1.I2 R12.2 SDC.I1 SDC.I2 TSAC.I1 TSAC.I2 TSAL.I1 TSAL.I2 WP.I1 WP.I2
LVMS_K1_In: "CMC 48 Pin.37" BATT.O1 BATT.O2 R18.2
Net5V_2: 5V.2 R17.1
NetBT1_2: BT1.2 BT2.1
NetBT2_2: BT2.2 D13.2A
NetC1_2: C1.2 Q1.2 U1.23
NetC2_2: C2.2 Q1.1 U1.24
NetC9_1: C9.1 R20.1 U1.62
NetC10_1: C10.1 R30.2 R31.1 R32.2
NetD13_1C: BATT.I1 BATT.I2 D13.1C
NetFault_2: Fault.2 R15.2
NetHeart_2: Heart.2 R16.2
NetJ1_2: J1.2 U3.8
NetJ1_3: J1.3 R33.2
NetR15_1: R15.1 U1.13
NetR16_1: R16.1 U1.14
NetR18_1: R18.1 U1.61
NetR32_1: R32.1 U3.5
Reset_uC: JTAG.6 U1.20 U4.1
SCI_HV_Distri: "CMC 48 Pin.46" R46.2
SCI_HV_Distri_5V: D46.1C R46.1 U1.41
SCI_INV0: "CMC 48 Pin.33" R43.2
SCI_INV0_5V: D43.1C R43.1 U1.38
SCI_INV1: "CMC 48 Pin.34" R44.2
SCI_INV1_5V: D44.1C R44.1 U1.39
SCI_SDB_Left: "CMC 48 Pin.9" R40.2
SCI_SDB_Left_5V: D40.1C R40.1 U1.45
SCI_SDB_Right: "CMC 48 Pin.10" R41.2
SCI_SDB_Right_5V: D41.1C R41.1 U1.44
SCI_TSAC: "CMC 48 Pin.21" R42.2
SCI_TSAC_5V: D42.1C R42.1 U1.37
SCI_TSMS: "CMC 48 Pin.45" R45.2
SCI_TSMS_5V: D45.1C R45.1 U1.40
Shutdown_Fused: "CMC 48 Pin.1" R4.2 SDC.O1 SDC.O2
TSAC_Fused: "CMC 48 Pin.15" R9.2 TSAC.O1 TSAC.O2
TSAL_Fused: "CMC 48 Pin.14" R8.2 TSAL.O1 TSAL.O2
WP_CTRL: "CMC 48 Pin.25" U1.11
WP_Sup_Fused: "CMC 48 Pin.24" R7.2 WP.O1 WP.O2
XCAN_N: U1.30 U3.1
XCAN_P: U1.31 U3.4
pads on no net: "CMC 48 Pin.22" "CMC 48 Pin.38" "CMC 48 Pin.50" BT1. BT2. JTAG.8 U1.1 U1.15 U1.16 U1.17 U1.18 U1.19 U1.25 U1.26 U1.29 U1.32 U1.33 U1.34 U1.35 U1.36 U1.42 U1.43 U1.46 U1.47 U1.58 U1.59

## Text inside footprints (layer, text, board x,y; h text height)
5V: Top Overlay "+" at 73.3,84.1 h0.76 r180
"CMC 48 Pin": Top Overlay "Conn_Outside" at 157.042,66.204 h1.52 r90
Fault: Top Overlay "+" at 120.4,81.3 h0.76 r270
Heart: Top Overlay "+" at 120.4,83.3 h0.76 r270
JTAG: Top Overlay "1" at 72.67,96.7 h1.27 r270; Top Overlay "10" at 70.27,111.1 h1.27 r270